# Altium PCB MiniHeating2.pcbdoc
Units mil, origin at the board's own origin, x right, y up, seen from the top; angles counter-clockwise.
Board outline 3060 x 2950 mil, 2 copper layers (Top Layer, Bottom Layer); 62 components, 63 nets, 242 pads, 148 vias.
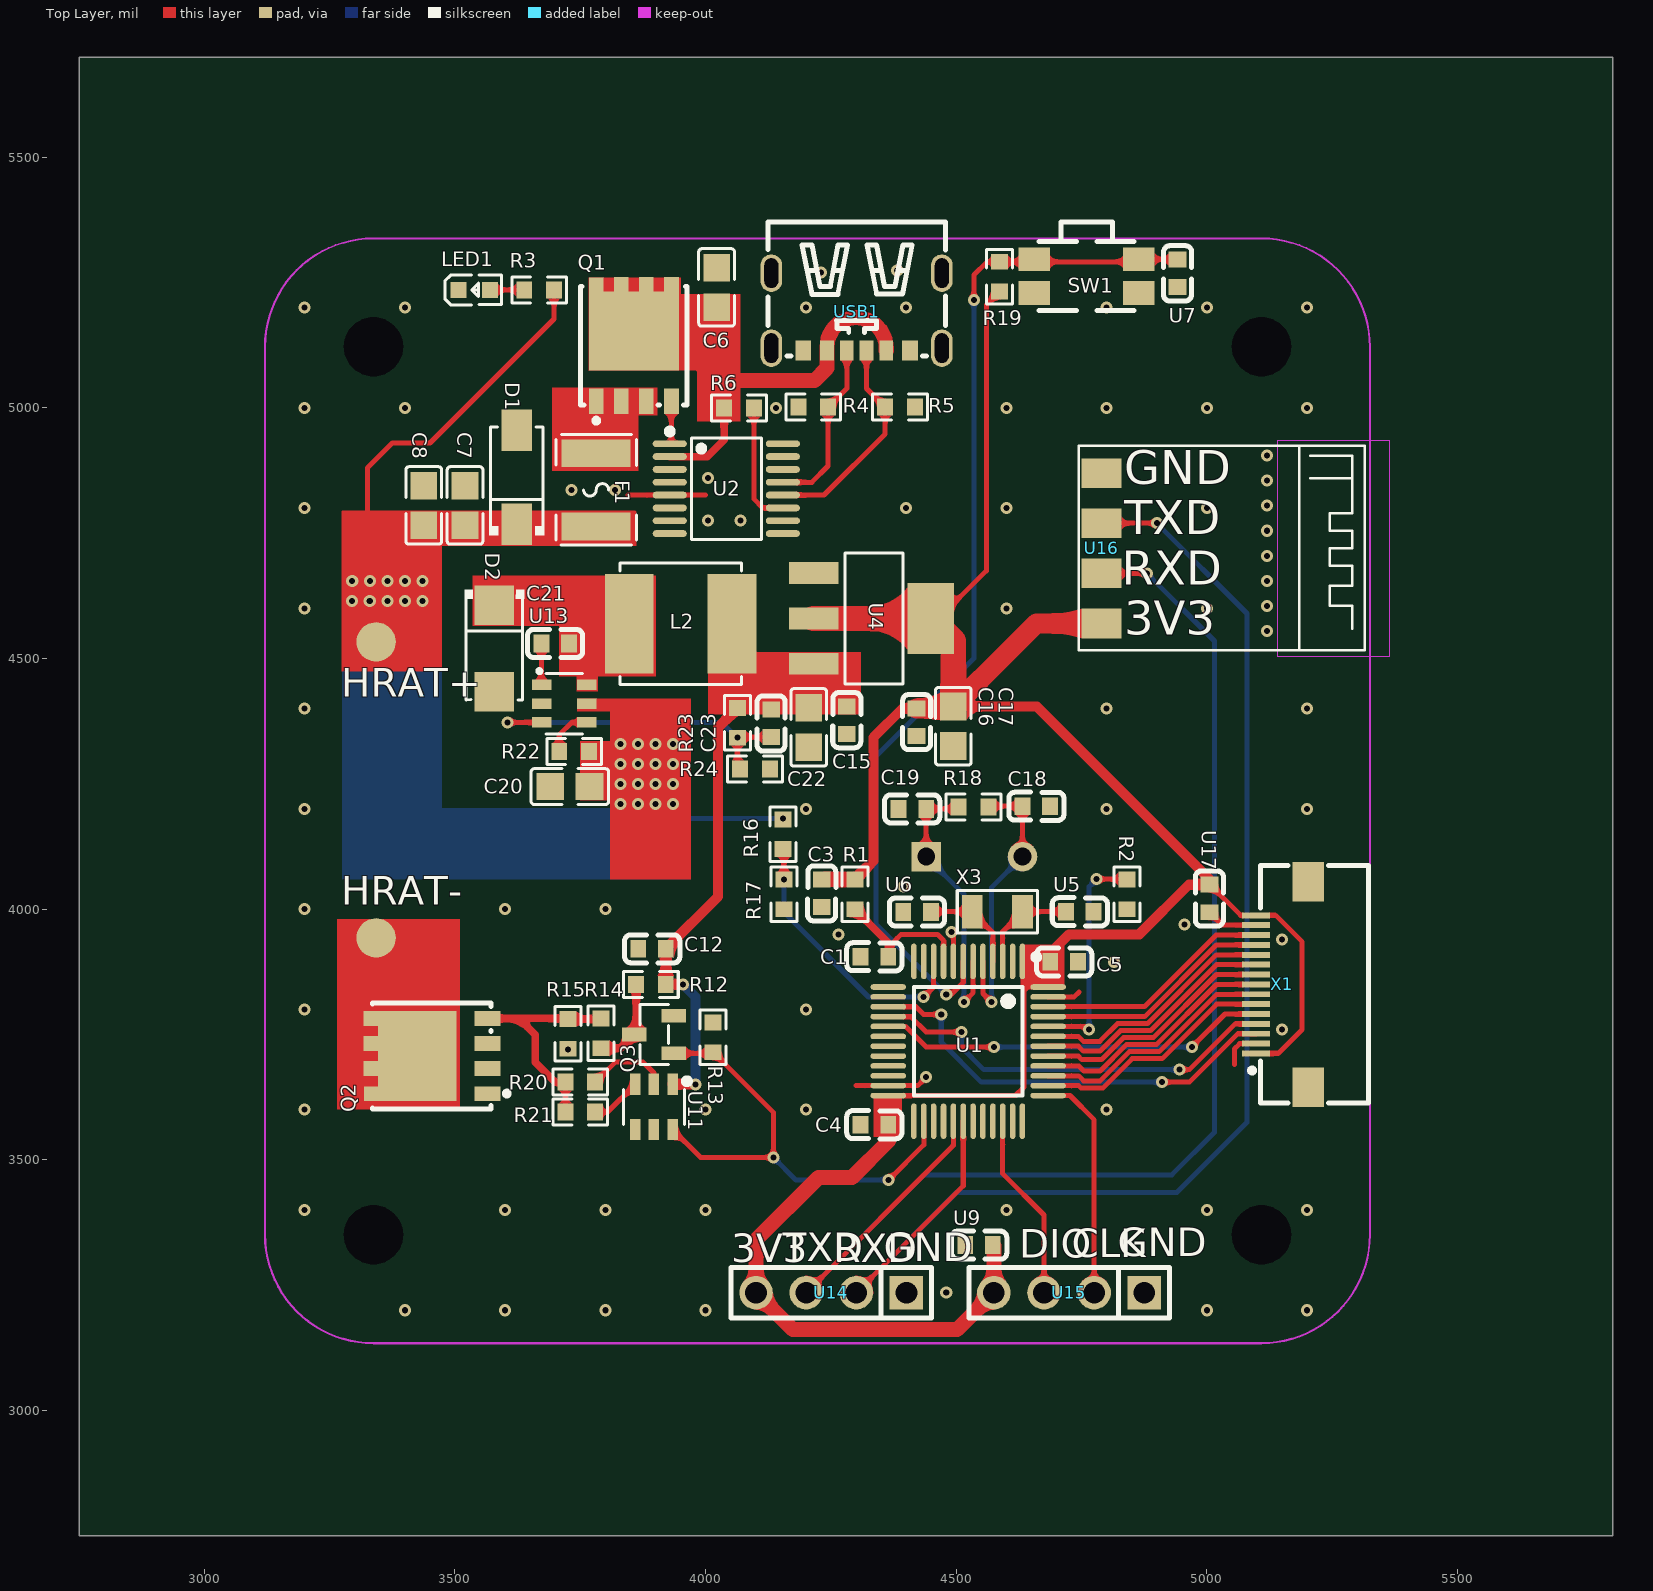
[diagram p0: Top Layer view]
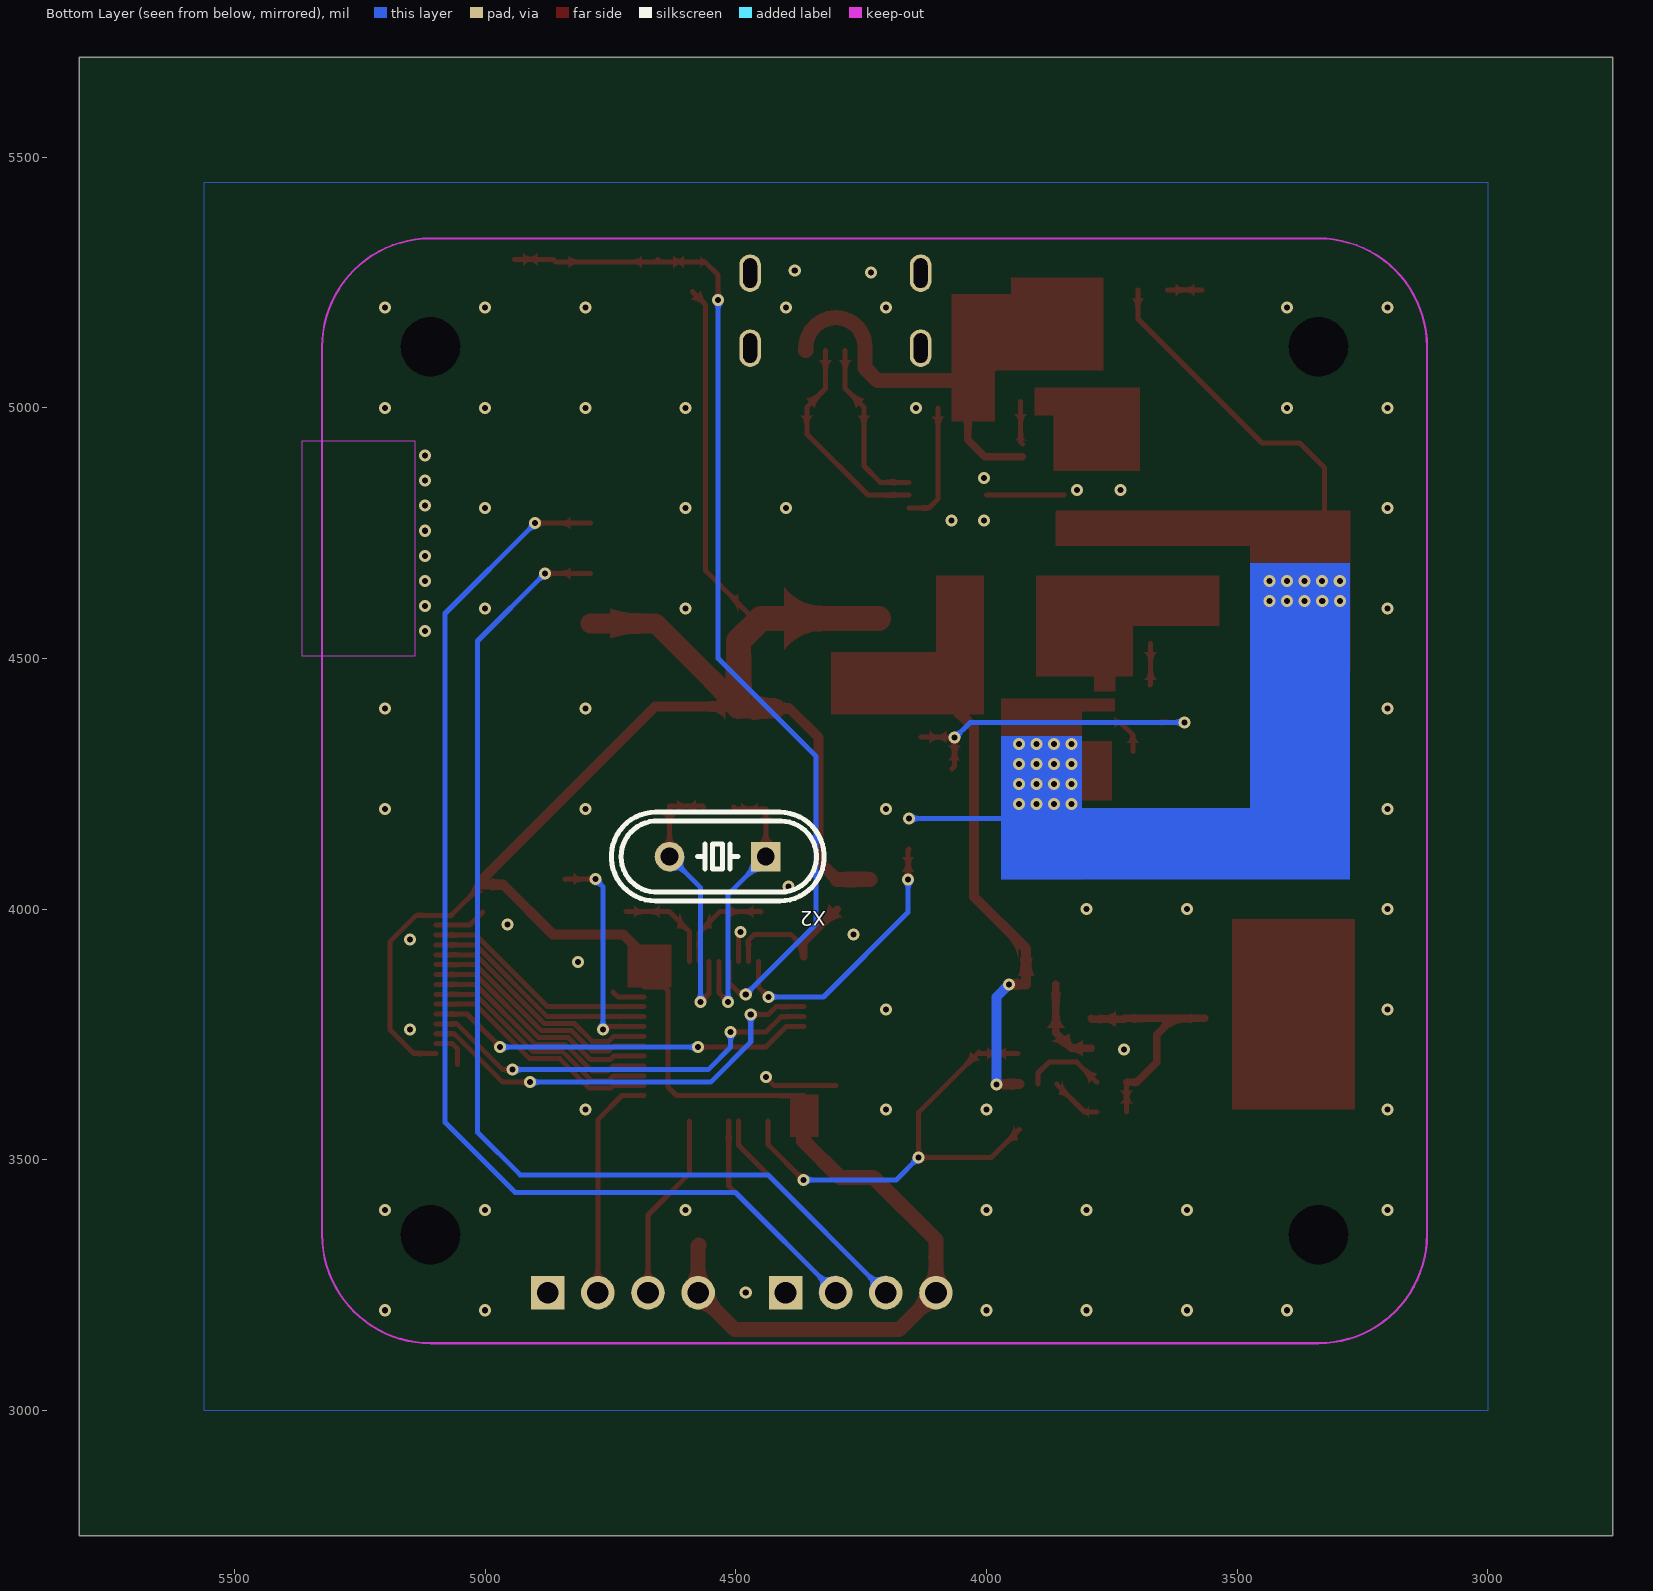
[diagram p1: Bottom Layer view, seen from below]

## Layer stack, top to bottom
Top Layer: signal copper (thickness not stored)
Dielectric: dielectric 12.6, FR-4, Dk 4.8
Bottom Layer: signal copper (thickness not stored)

## Board outline
5810,2750 2750,2750 2750,5700 5810,5700
cut-out: 3337.32,5063.11 cw(c3337.32,5122.16) 3278.26,5122.16 cw(c3337.32,5122.16) 3337.32,5181.22 cw(c3337.32,5122.16) 3396.37,5122.16 cw(c3337.32,5122.16)
cut-out: 5108.97,5063.11 cw(c5108.97,5122.16) 5049.91,5122.16 cw(c5108.97,5122.16) 5108.97,5181.22 cw(c5108.97,5122.16) 5168.02,5122.16 cw(c5108.97,5122.16)
cut-out: 5049.91,3350.51 cw(c5108.97,3350.51) 5108.97,3409.57 cw(c5108.97,3350.51) 5168.02,3350.51 cw(c5108.97,3350.51) 5108.97,3291.46 cw(c5108.97,3350.51)
cut-out: 3278.26,3350.51 cw(c3337.32,3350.51) 3337.32,3409.57 cw(c3337.32,3350.51) 3396.37,3350.51 cw(c3337.32,3350.51) 3337.32,3291.46 cw(c3337.32,3350.51)

## Components (designator, comment, footprint, x,y, rotation, side; value= is the part's Value field where it differs from the comment)
C1 "CC0603KRX7R9BB104" C0603 4336.72,3905 r0 top
C3 "CC0603KRX7R9BB104" C0603 4231.68,4031.89 r90 top
C4 "CC0603KRX7R9BB104" C0603 4336.72,3570 r0 top
C5 "CC0603KRX7R9BB104" C0603 4715,3895 r180 top
C6 "10uF_C15415" C0805 4021.81,5240.3 r270 top
C7 "GRT21BC71E106KE13L" C0805 3520.05,4805.42 r270 top
C8 "GRT21BC71E106KE13L" C0805 3437.53,4805.42 r270 top
C12 "C1608C0G1H090D080AA" C0603 3893.06,3921.03 r180 top
C15 "0603BB104K500NGT" C0603 4281.52,4376.82 r270 top
C16 "0603BB104K500NGT" C0603 4420.89,4373.07 r270 top
C17 "GRT21BC71E106KE13L" C0805 4494.13,4365.01 r270 top
C18 "CGA3E2C0G1H060DT0Y0N" C0603 4659.56,4205.43 r180 top
C19 "CGA3E2C0G1H060DT0Y0N" C0603 4412.32,4200 r0 top
C20 "GRT21BC71E106KE13L" C0805 3729.24,4244.68 r0 top
C21 "0603BB104K500NGT" C0603 3700,4530 r0 top
C22 "GRT21BC71E106KE13L" C0805 4205.55,4362.64 r90 top
C23 "0603BB104K500NGT" C0603 4130.67,4370.83 r90 top
D1 "SZ1SMA26AT3G" SMA_L4.3-W2.6-LS5.2-FD 3623.25,4861.55 r270 top
D2 "SS34_C8678" SMA_L4.3-W2.6-LS5.2-RD 3578.5,4519.99 r270 top
F1 "FSMD075-33R" F1812 3781.62,4836.61 r270 top
L2 "SWPA6045S100MT" IND-SMD_L6.0-W6.0_SWPA6045S 3950.15,4569.49 r0 top
LED1 "KT-0603R" LED0603-RD 3538.34,5235.16 r0 top
Q1 "BSC123N08NS3 G" PG-TDSON-8_L5.0-W6.0-P1.27-BL-EP 3856.62,5124.29 r0 top
Q2 "BSC123N08NS3 G" PG-TDSON-8_L5.0-W6.0-P1.27-BL-EP 3453.73,3707.04 r90 top
Q3 "SS8050_C2150" SOT-23-3_L2.9-W1.3-P1.90-LS2.4-BR 3897.28,3750 r0 top
R1 "0603WAF4703T5E" R0603 4297.72,4029.66 r270 top
R2 "0603WAF2402T5E" R0603 4840.34,4029.66 r270 top
R3 "RNCS0603BKE10K0" R0603 3667.87,5235.29 r180 top
R4 "AC0603DR-0710KL" R0603 4214.59,5001.61 r180 top
R5 "AC0603DR-0710KL" R0603 4387.83,5001.61 r0 top
R6 "HoLTT0805-1/8W-100K-5%" R0603 4066.62,4999.7 r180 top
R12 "0603WAF4703T5E" R0603 3890.84,3850 r0 top
R13 "0603WAF4703T5E" R0603 4015,3744.36 r270 top
R14 "0603WAF4703T5E" R0603 3791.17,3752.38 r270 top
R15 "0603WAF4703T5E" R0603 3725.16,3751.27 r270 top
R16 "0603WAF4703T5E" R0603 4154.03,4149.66 r90 top
R17 "0603WAF4703T5E" R0603 4156.13,4029.66 r90 top
R18 "0603WAF1004T5E" R0603 4534.23,4203.76 r0 top
R19 "0603WAF1004T5E" R0603 4586.49,5261.89 r270 top
R20 "0603WAF4703T5E" R0603 3750,3655 r0 top
R21 "0603WAF4703T5E" R0603 3750,3595.55 r0 top
R22 "AR03BTC5002A" R0603 3737.61,4314.68 r0 top
R23 "AR03BTC5002A" R0603 4063.39,4371.77 r90 top
R24 "AR03BTC5002A" R0603 4098.37,4280 r180 top
SW1 "TS-1186D-C-A" SW-SMD_TS-1186D-C-A 4760,5262.92 r180 top
U1 "CW32F030C8T6_C3019113" LQFP-48_L7.0-W7.0-P0.50-LS9.0-TL 4523.73,3736.57 r270 top
U2 "IP2721" TSSOP-16_L5.0-W4.4-P0.65-LS6.4-BL 4041.21,4838.94 r270 top
U4 "LM1117GS-3.3" SOT-223-3_L6.5-W3.4-P2.30-LS7.0-BR 4332.31,4580 r180 top
U5 "C1608C0G1H090D080AA" C0603 4746.18,3995 r180 top
U6 "C1608C0G1H090D080AA" C0603 4421.76,3994.24 r0 top
U7 "C1608C0G1H090D080AA" C0603 4941.52,5268.83 r90 top
U9 "C1608C0G1H090D080AA" C0603 4545.38,3330 r180 top
U11 "UCC27511DBVR" SOT-23-6_L2.9-W1.6-P0.95-LS2.8-BL 3896.9,3605.67 r180 top
U13 "LGS5145" SOT-23-6_L2.9-W1.7-P0.95-LS2.8-BL 3718.19,4410 r270 top
U14 "ZX-PZ2.54-1-4PZZ" HDR-TH_4P-P2.54-V-M 4250.55,3235 r180 top
U15 "ZX-PZ2.54-1-4PZZ" HDR-TH_4P-P2.54-V-M 4725,3235 r180 top
U16 "ECB01H2" ECB01H2 5315,4925 r270 top
U17 "C1608C0G1H090D080AA" C0603 5005,4021.62 r90 top
USB1 "TYPE-C-6P-DIP2X2" TYPE-C-SMD_TYPE-C-6P 4301.21,5191.61 r180 top
X1 "AFC01-S15FCA-00" FPC-SMD_15P-P0.50_JS_AFC01-S15FCA-00 5150,3850 r90 top
X2 "TAXD8M2GLFBET2T" HC-49US_L11.5-W4.5-P4.88 4535.94,4105 r0 bottom
X3 "SF32WK32768D31T002" OSC-SMD_L3.2-W1.5 4581.8,3995 r180 top

## Footprints (in the part's own frame and the unit in brackets; to place one, negate y for a bottom-side part, rotate by r counter-clockwise, add the part's x,y. Pads: shape width x height; smd on the part's side, far side on the other; paste and mask are expansions set on the pad)
C0603 [mm]
  rect 0.8x0.9 smd mask+0.051: 1(-0.7,0) 2(0.7,0)
  silkscreen extent -1.41,-0.71 1.39,0.72
C0805 [mm]
  rect 1.41x1.35 smd paste-100 mask+0.051: 1(-1,0) 2(1,0)
  silkscreen extent -1.96,-0.9 1.96,0.9
ECB01H2 [mm]
  rect 1.5x2.02 smd mask+0.051: 1(1.397,-13.335) 2(3.937,-13.335) 3(6.477,-13.335) 4(9.017,-13.335)
  silkscreen extent 0,-14.5 10.38,0
F1812 [mil]
  rect 55.38x137.76 smd paste-3937.01 mask+2: 1(-72.97,0) 2(72.97,0)
  silkscreen extent -110,-80 110,80
FPC-SMD_15P-P0.50_JS_AFC01-S15FCA-00 [mm]
  rect 0.3x1.4 smd paste+0 mask+0.05: 1(-3.5,1.325) 2(-3,1.325) 3(-2.5,1.325) 4(-2,1.325) 5(-1.5,1.325) 6(-1,1.325) 7(-0.5,1.325) 8(0,1.325) 9(0.5,1.325) 10(1,1.325) 11(1.5,1.325) 12(2,1.325) 13(2.5,1.325) 14(3,1.325) 15(3.5,1.325)
  rect 2x1.6 smd mask+0.051: 16(5.2,-1.325) 17(-5.2,-1.325)
  silkscreen extent -6.01,-4.37 6.01,1.65
HC-49US_L11.5-W4.5-P4.88 [mm]
  rect 1.5x1.5 hole 0.9 mask+0.051: 1(-2.44,0)
  round 1.5 hole 0.9 mask+0.051: 2(2.44,0)
  silkscreen extent -5.39,-2.25 5.39,2.25
HDR-TH_4P-P2.54-V-M [mm]
  rect 1.7x1.7 hole 1.1 mask+0.051: 1(-3.81,0)
  round 1.7 hole 1.1 mask+0.051: 2(-1.27,0) 3(1.27,0) 4(3.81,0)
  silkscreen extent -5.08,-1.27 5.08,1.27
IND-SMD_L6.0-W6.0_SWPA6045S [mm]
  rect 2.474x5.02 smd mask+0.051: 1(-2.603,0) 2(2.603,0)
  silkscreen extent -3.08,-3.08 3.08,3.08
LED0603-RD [mm]
  rect 0.8x0.8 smd mask+0.051: 1(-0.799,-0.003) 2(0.799,0.003)
  silkscreen extent -1.49,-0.75 1.39,0.76
LQFP-48_L7.0-W7.0-P0.50-LS9.0-TL [mm]
  oval 1.8x0.28 smd mask+0.051: 1(-4.05,2.75) 2(-4.05,2.25) 3(-4.05,1.75) 4(-4.05,1.25) 5(-4.05,0.75) 6(-4.05,0.25) 7(-4.05,-0.25) 8(-4.05,-0.75) 9(-4.05,-1.25) 10(-4.05,-1.75) 11(-4.05,-2.25) 12(-4.05,-2.75) 25(4.05,-2.75) 26(4.05,-2.25) 27(4.05,-1.75) 28(4.05,-1.25) 29(4.05,-0.75) 30(4.05,-0.25) 31(4.05,0.25) 32(4.05,0.75) 33(4.05,1.25) 34(4.05,1.75) 35(4.05,2.25) 36(4.05,2.75)
  oval 0.28x1.8 smd mask+0.051: 13(-2.75,-4.05) 14(-2.25,-4.05) 15(-1.75,-4.05) 16(-1.25,-4.05) 17(-0.75,-4.05) 18(-0.25,-4.05) 19(0.25,-4.05) 20(0.75,-4.05) 21(1.25,-4.05) 22(1.75,-4.05) 23(2.25,-4.05) 24(2.75,-4.05) 37(2.75,4.05) 38(2.25,4.05) 39(1.75,4.05) 40(1.25,4.05) 41(0.75,4.05) 42(0.25,4.05) 43(-0.25,4.05) 44(-0.75,4.05) 45(-1.25,4.05) 46(-1.75,4.05) 47(-2.25,4.05) 48(-2.75,4.05)
  silkscreen extent -4.42,-2.75 2.75,3.6
OSC-SMD_L3.2-W1.5 [mm]
  rect 1.05x1.7 smd mask+0.051: 1(-1.275,0) 2(1.275,0)
  silkscreen extent -2.03,-1.08 2.03,1.08
PG-TDSON-8_L5.0-W6.0-P1.27-BL-EP [mil]
  rect 29.5x51.2 smd paste-3937.01 mask+2: 1(-75,-111) 2(-25,-111) 3(25,-111) 4(75,-111) 5(75,111) 6(25,111) 7(-25,111) 8(-75,110)
  rect 179.53x157.48 smd paste-3937.01 mask+2: 8(0,29)
  silkscreen extent -106,-154 106,118
R0603 [mil]
  rect 31.75x34.02 smd paste-3937.01 mask+2: 1(-29.66,0) 2(29.66,0)
  silkscreen extent -55,-26 55,26
SMA_L4.3-W2.6-LS5.2-FD [mil]
  rect 82.97x61.65 smd paste+0 mask+2: 1(-93.95,0) 2(93.95,0)
  silkscreen extent -100,-55 115,55
SMA_L4.3-W2.6-LS5.2-RD [mm]
  rect 2x2 smd mask+0.051: 1(-2.2,0) 2(2.2,0)
  silkscreen extent -2.98,-1.5 2.6,1.5
SOT-23-3_L2.9-W1.3-P1.90-LS2.4-BR [mm]
  rect 1.25x0.7 smd mask+0.051: 1(1,-0.95) 2(1,0.95) 3(-1,0)
  silkscreen extent -0.73,-1.53 0.73,1.53
SOT-23-6_L2.9-W1.6-P0.95-LS2.8-BL [mil]
  rect 20.95x42.2 smd mask+2: 1(-37.4,-45.24) 2(0,-45.24) 3(37.4,-45.24) 4(37.4,45.24) 5(0,45.24) 6(-37.4,45.24)
  silkscreen extent -72,-57 61,35
SOT-23-6_L2.9-W1.7-P0.95-LS2.8-BL [mm]
  rect 0.532x0.99 smd mask+0.051: 1(-0.95,-1.145) 2(0,-1.145) 3(0.95,-1.145) 4(0.95,1.145) 5(0,1.145) 6(-0.95,1.145)
  silkscreen extent -1.75,-1.37 1.53,0.93
SOT-223-3_L6.5-W3.4-P2.30-LS7.0-BR [mm]
  rect 2.5x1.1 smd mask+0.051: 1(2.97,-2.3) 2(2.97,0) 3(2.97,2.3)
  rect 2.34x3.6 smd mask+0.051: 4(-2.97,0)
  silkscreen extent -1.57,-3.33 1.37,3.33
SW-SMD_TS-1186D-C-A [mm]
  rect 1.6x1.2 smd mask+0.051: 1(-2.65,0.85) 2(2.65,0.85) 3(-2.65,-0.85) 4(2.65,-0.85)
  silkscreen extent -2.4,-2.75 2.4,1.75
TSSOP-16_L5.0-W4.4-P0.65-LS6.4-BL [mil]
  oval 13.5x68.17 smd mask+2: 1(-89.57,-112.82) 2(-63.98,-112.82) 3(-38.39,-112.82) 4(-12.79,-112.82) 5(12.8,-112.82) 6(38.39,-112.82) 7(63.98,-112.82) 8(89.57,-112.82) 9(89.57,112.83) 10(63.98,112.83) 11(38.39,112.83) 12(12.8,112.83) 13(-12.79,112.83) 14(-38.39,112.83) 15(-63.98,112.83) 16(-89.57,112.83)
  silkscreen extent -120,-119 101,70
TYPE-C-SMD_TYPE-C-6P [mm]
  oval 1.1x1.9 hole 0.7 slot 1.5 at 90 deg mask+0.051: 7(-4.32,-1.963) 7(-4.32,1.838) 7(4.32,-1.963) 7(4.32,1.838)
  rect 0.7x1 smd paste-100 mask+0.051: A5(-0.5,1.963) A9(1.5,1.963) B5(0.5,1.963) B9(-1.5,1.963)
  rect 0.8x1 smd paste-100 mask+0.051: A12(2.7,1.963) B12(-2.7,1.963)
  silkscreen extent -4.5,-4.56 4.5,2.24

## Free pads (board coordinates)
  round 78.74 smd mask+2: 1(3342.61,3942.69) 2(3342.61,4533.24)

## Via types
v1: diameter 24, hole 12, Top Layer to Bottom Layer, 82 vias
v2: diameter 24.02, hole 12.01, Top Layer to Bottom Layer, 66 vias

## Nets (pads, with @x,y where several pads share a name; then routed paths per layer and width w, separated by ;. In a path a pad name is that pad's centre, name@x,y a point inside that pad or via, vN(x,y) a via of type N, cw(c..) or ccw(c..) an arc to the next point about the centre after c; other vN are vias at no path point)
$1N7305: C1.2 R1.2 U1.9 | length 290.4
  Top Layer w10: 4364.28,3924.28 4390,3950 4462.44,3950 4474.52,3937.91 U1.9
  Top Layer w15: R1.2 4364.28,3933.44 4364.28,3924.28 C1.2
$1N7307: R2.1 U1.44 | length 451.2
  Top Layer w10: U1.44 4758.9,3766.1 v2(4765,3760) ; v2(4780,4060) 4839.66,4060 R2.1
  Bottom Layer w10: v2(4765,3760) 4765,4045 v2(4780,4060)
$1N7318: Q1.4 U2.1 | length 86.1
  Top Layer w10: U2.1 3931.62,4931.75 Q1.4
$1N7321: F1.1 Q1.1 Q1.2 Q1.3
$1N7325: LED1.2 R3.2 | length 68.4
  Top Layer w10: LED1.2 R3.2
$1N7329: R6.1 U2.11 | length 246.3
  Top Layer w10: R6.1 4096.28,4818.72 4114.45,4800.55 U2.11
$1N7350: Q3.3 R12.1 R14.2 | length 179.4
  Top Layer w15: R14.2 3830.63,3722.72 Q3.3 3861.18,3753.26 R12.1
$1N7464: R20.2 U11.2 | length 165.1
  Top Layer w10: R20.2 3819.66,3695 3875,3695 3896.9,3673.1 U11.2
$1N7465: R21.2 U11.3 | length 102.8
  Top Layer w10: R21.2 3804.14,3595.55 U11.3
$1N11495: C21.1 U13.1 | length 82.9
  Top Layer w10: C21.1 3672.44,4448.07 U13.1
$1N11697: R22.1 U13.4 | length 98.8
  Top Layer w10: R22.1 3707.95,4347.95 3732.6,4372.6 U13.4
$1N11703: C21.2 D2.1 L2.1 U13.6
$1N12087: C23.1 R23.1 R24.2 U13.3 | length 673.7
  Top Layer w10: v2(3605,4372.6) U13.3 ; R24.2 4063.39,4285.31 v2(4063.39,4342.11) 4064.55,4343.27 C23.1
  Bottom Layer w10: v2(3605,4372.6) 4032.4,4372.6 v2@4065,4340
+3.3V: C3.2 C4.2 C5.2 C16.1 C17.1 R1.1 R19.2 U1.1 U1.24 U1.48 U4.2 U4.4 U9.1 U14.4 U15.4 U16.4 U17.2 X1.1 X1.15 | length 5256.8
  Top Layer w10: U1.24 4618.3,3628.3 4635,3645 4635,3837.09 4642.75,3844.84 U1.48 ; U4.4@4457.16,4572.07 4560,4674.9 4560,5205.75 R19.2 ; U17.2 5005.82,4049.18 5067.21,3987.79 X1.15 5137.21,3987.79 5190,3935 5190,3760 5142.2,3712.2 X1.1
  Top Layer w20: R1.1 4335,4096.6 4335,4343.03 4392.6,4400.63 C16.1 ; C17.1 4660.62,4404.38 U17.2@5005,4060 ; C5.2 4687.44,3912.44 4725,3950 4865,3950 4964.18,4049.18 U17.2
  Top Layer w30: C3.2 4297.6,4059.45 R1.1 ; C4.2 4364.28,3537.28 4292,3465 4225,3465 4100.11,3340.11 4100.55,3339.67 U14.4 4174.27,3161.29 4501.29,3161.29 U15.4 4575,3327.94 U9.1
  Top Layer w40: C16.1 4490.38,4400.63 C17.1 4659.75,4570 U16.4
  Top Layer w50: U4.2 U4.4 4457.16,4572.07 4494.13,4535.11 C17.1
+5V: C12.1 C15.1 C22.2 C23.2 L2.2 R12.2 R23.2 U4.3 U11.1 | length 901.6
  Top Layer w20: R12.2 R12.2@3920.62,3850.13 ; U11.1 3979.09,3650.91 v2(3980,3650) ; v2(3955,3850.13) R12.2@3920.62,3850.13 ; R23.2 4025,4363.04 4025,4025.41 C12.1 R12.2@3920.62,3850.13
  Bottom Layer w20: v2(3955,3850.13) 3980,3825.13 v2(3980,3650)
+20V: C7.2 C8.2 C20.2 D1.2 F1.2 pad.2 R3.1 R16.2 R22.2 U13.5 | length 893
  Top Layer w10: 3325,4755 3325,4880 3375,4930 3450,4930 3697.53,5177.53 R3.1
  Bottom Layer w10: 3940,4180 3940.96,4180.96 v2(4154.03,4180.96)
  other v2: 3830,4210 3830,4210 3865,4210 3865,4210 3900,4210 3900,4210 3935,4210 3830,4250 3865,4250 3865,4250 3900,4250 3900,4250 3935,4250 3935,4250 3830,4290 3830,4290 3865,4290 3865,4290 3900,4290 3900,4290 3935,4290 3935,4290 3830,4330 3865,4330 3865,4330 3900,4330 3900,4330 3935,4330 3935,4330 3294.96,4614.84 3329.96,4614.84 3329.96,4614.84 3329.96,4614.84 3364.96,4614.84 3364.96,4614.84 3399.96,4614.84 3399.96,4614.84 3434.96,4614.84 3295,4655 3330.01,4655 3364.99,4655 3399.97,4655 3434.96,4655
CC1: R4.1 U2.13 USB1.A5 | length 349.2
  Top Layer w10: U2.13 4211.73,4851.73 4244.25,4884.25 R4.1 4281.52,5038.89 4281.52,5114.35
CC2: R5.1 U2.12 USB1.B5 | length 436.3
  Top Layer w10: U2.12 4236.14,4826.14 4358.17,4948.17 R5.1 4320.89,5038.89 4320.89,5114.35
EC11_A: U1.45 X1.12 | length 473.9
  Top Layer w10: U1.45 4875.78,3785.78 5018.73,3928.73 X1.12
EC11_B: U1.46 X1.13 | length 473.9
  Top Layer w10: U1.46 4875.47,3805.47 5018.42,3948.42 X1.13
EC11_KEY: U1.43 X1.11 | length 490.3
  Top Layer w10: U1.43 4743.59,3746.41 4753.59,3736.41 4786.41,3736.41 4821.78,3771.78 4881.58,3771.78 5018.85,3909.05 X1.11
GND: C1.1 C3.1 C4.1 C5.1 C6.1 C7.1 C8.1 C12.2 C15.2 C16.2 C17.2 C18.1 C19.1 C20.1 C22.1 D1.1 D2.2 LED1.1 Q2.1 Q2.2 Q2.3 Q3.2 R2.2 R4.2 R5.2 R13.1 R15.2 R17.1 R24.1 SW1.1 SW1.2 U1.8 U1.23 U1.47 U2.5 U4.1 U5.1 U6.1 U7.1 U9.2 U11.4 U11.5 U13.2 U14.1 U15.1 U16.1 U17.1 USB1.7 USB1.A12 USB1.B12 X1.2 X1.14 | length 610.9
  Top Layer w10: 3845,4826.14 U2.5 4000,4826.14 ; 4300,3647.99 U1.23 4422.99,3647.99 v1(4440,3665) ; v1(4490,3955) 4494.2,3950.8 U1.8 ; U1.47 4735.15,3825.15 4745,3835 ; U17.1 5030.96,3968.1 X1.14 ; 5055,3690 5055,3721.61 5065.28,3731.88 X1.2
  other v1: 3400,3200 3600,3200 3800,3200 4000,3200 5000,3200 5200,3200 4480,3235 3200,3400 3600,3400 3800,3400 4000,3400 4600,3400 5000,3400 5200,3400 3200,3600 4000,3600 4200,3600 4800,3600 3725.16,3719.97 5150,3760 3200,3800 4200,3800 4815,3895 5150,3940 4265,3950 4955.62,3969.86 3200,4000 3600,4000 3800,4000 4395,4045 3200,4200 4200,4200 4800,4200 5200,4200 3200,4400 4800,4400 5200,4400 5120,4555 5120,4555 3200,4600 4600,4600 5000,4600 5120,4605 5120,4605 5120,4655 5120,4655 5120,4705 5120,4705 5120,4755 4005,4775 4070,4775 3200,4800 4400,4800 4600,4800 5000,4800 5120,4805 5120,4805 3732.13,4836.61 3819.12,4836.61 3819.12,4836.61 5120,4855 5120,4855 4005,4860 5120,4905 3200,5000 3400,5000 4140,5000 4600,5000 4800,5000 5000,5000 5200,5000 3200,5200 3400,5200 4200,5200 4400,5200 4800,5200 5000,5200 5200,5200 4230,5270 4382.24,5273.89
HEAT_PWM: Q3.1 R13.2 U1.26 U11.6 | length 957.1
  Top Layer w10: U11.6 3989.73,3505 v2(4135,3505) 4135,3594.7 R13.2 4012.9,3712.6 Q3.1 ; v2(4365,3460) 4435.15,3530.15 U1.26
  Bottom Layer w10: v2(4135,3505) 4180,3460 v2(4365,3460)
HRAT-: pad.1 Q2.5 Q2.6 Q2.7 Q2.8
K_CS: U1.17 X1.5 | length 777.9
  Top Layer w10: U1.17 4398.9,3766.1 4440,3725 v2(4575,3725) ; v2(4970,3725) 5035.94,3790.94 X1.5
  Bottom Layer w10: v2(4575,3725) v2(4970,3725)
K_MISO: U1.16 X1.4 | length 832.7
  Top Layer w10: U1.16 4409.22,3785.78 4440,3755 v2(4510,3755) ; v2(4945,3680) 4965,3680 5056.25,3771.25 X1.4
  Bottom Layer w10: v2(4510,3755) 4510,3725 4555,3680 v2(4945,3680)
K_SCK: U1.15 X1.3 | length 868.1
  Top Layer w10: U1.15 4419.59,3805.47 4435.06,3790 v2(4470,3790) ; v2(4910,3655) 4965,3655 5061.57,3751.57 X1.3
  Bottom Layer w10: v2(4470,3790) 4470,3735 4550,3655 v2(4910,3655)
NMOS-G: Q2.4 R14.1 R15.1 R20.1 R21.1 | length 464
  Top Layer w10: R21.1 R20.1
  Top Layer w15: Q2.4 3627.96,3782.04 ; R20.1 3700,3655 3660,3695 3660,3750 3627.96,3782.04 ; R14.1 3790.06,3780.93 R15.1 3724.05,3782.04 3627.96,3782.04
NRST: R19.1 SW1.3 SW1.4 U1.7 U7.2 | length 2086
  Top Layer w10: v2(4480,3830) 4490,3830 4513.89,3853.89 U1.7 ; v2(4535,5215) 4535,5265 4561.55,5291.55 R19.1 SW1.4@4650.84,5291.55 ; SW1.4 SW1.4@4650.84,5291.55 ; U7.2 SW1.3 4859.5,5291.55 SW1.4@4650.84,5291.55
  Bottom Layer w10: v2(4480,3830) 4340,3970 4340,4305 4535,4500 v2(4535,5215)
OLED_CLK: U1.38 X1.6 | length 485.6
  Top Layer w10: U1.38 4744.13,3647.99 4748.47,3643.66 4792.87,3643.66 4850.94,3701.72 4910.6,3701.72 5019.51,3810.62 X1.6
OLED_CS: U1.42 X1.10 | length 490.3
  Top Layer w10: U1.42 4743.47,3726.73 4753.47,3716.73 4786.73,3716.73 4827.77,3757.77 4887.39,3757.77 5018.98,3889.36 X1.10
OLED_D/C: U1.41 X1.9 | length 487.9
  Top Layer w10: U1.41 4743.36,3707.04 4750.4,3700 4789.8,3700 4833.55,3743.75 4893.19,3743.75 5019.13,3869.68 X1.9
OLED_RES: U1.40 X1.8 | length 490.3
  Top Layer w10: U1.40 4744.38,3687.36 4754.38,3677.36 4786.96,3677.36 4839.33,3729.73 4898.97,3729.73 5019.23,3849.99 X1.8
OLED_SDA: U1.39 X1.7 | length 490.3
  Top Layer w10: U1.39 4744.27,3667.67 4754.27,3657.67 4787.07,3657.67 4845.13,3715.73 4904.8,3715.73 5019.36,3830.3 X1.7
PA0: R16.1 R17.2 U1.10 | length 555.1
  Top Layer w10: R16.1 4156.13,4117.9 v2(4156.13,4059.32) ; v2(4435,3825) 4454.83,3844.83 U1.10
  Bottom Layer w10: v2(4156.13,4059.32) 4156.13,3993.87 4325,3825 v2(4435,3825)
PA1: U1.11
PA2: U1.12
PA3: U1.13
PA4: U1.14
PA8: U1.29 U14.3 U16.3 | length 2671.7
  Top Layer w10: U14.3 4494.2,3528.65 U1.29 ; U16.3 v2(4880,4670)
  Bottom Layer w10: U14.3 4435.55,3470 4930,3470 5015,3555 5015,4535 v2(4880,4670)
PA9: U1.30 U14.2 U16.2 | length 2730.3
  Top Layer w10: U14.2 4513.89,3448.34 U1.30 ; U16.2 v2(4900,4770)
  Bottom Layer w10: U14.2 4500.55,3435 4940,3435 5080,3575 5080,4590 v2(4900,4770)
PA10: U1.31
PA11: U1.32
PA12: U1.33
PA13/SWDDIO: U1.34 U15.3 | length 376.2
  Top Layer w10: U1.34 4592.63,3472.37 4675,3390 U15.3
PA14/SWCLK: U1.37 U15.2 | length 456.8
  Top Layer w10: U1.37 4726.7,3628.3 4775,3580 U15.2
PB0: U1.18
PB1: U1.19
PB2: U1.20
PB10: U1.21
PB11: U1.22
PB12: U1.25
PB14: U1.27
PB15: U1.28
PC13: U1.2
PC14: U1.3 U5.2 X3.1 | length 201.9
  Top Layer w10: U1.3 4592.63,3955.63 X3.1 U5.2
PC15: U1.4 U6.2 X3.2 | length 198.7
  Top Layer w10: U6.2 4450.08,3995 X3.2 4572.94,3953.66 U1.4
PF0: C18.2 R18.2 U1.5 X2.2 | length 572.9
  Top Layer w10: U1.5 4553.26,3831.74 v2(4570,3815) ; R18.2 4565.56,4205.43 C18.2 X2.2
  Bottom Layer w10: v2(4570,3815) 4570,4043 X2.2
PF1: C19.2 R18.1 U1.6 X2.1 | length 571.1
  Top Layer w10: X2.1 C19.2 4500.8,4200 R18.1 ; v2(4515,3815) 4533.57,3833.57 U1.6
  Bottom Layer w10: X2.1 4515,4029.88 v2(4515,3815)
PF6: U1.35
PF7: U1.36
VBUS: C6.2 Q1.5 Q1.6 Q1.7 Q1.8 R6.2 U2.2 USB1.A9 USB1.B9 | length 646.2
  Top Layer w15: U2.2 4002.92,4902.92 4036.96,4936.96 R6.2
  Top Layer w30: 4025,5055 4217.49,5055 4242.15,5079.66 USB1.A9 4242.15,5122.15 cw(c4300,5122.15) 4300,5180 cw(c4300,5119.74) 4360.26,5119.74 USB1.B9
"": U2.3 U2.4 U2.6 U2.7 U2.8 U2.9 U2.10 U2.14 U2.15 U2.16 X1.16 X1.17

## Polygon pours and split planes (outlines as drawn)
GND on Top Layer (solid, remove dead copper, pour order 0): 3000,3000 5560,3000 5560,5450 3000,5450
GND on Bottom Layer (solid, remove dead copper, pour order 1): 3000,3000 5560,3000 5560,5450 3000,5450

## Keep-outs
Board Outline Layer:
  lines w3.94 net "": 3337.32,5338.2 5108.47,5338.2 cw(c5108.47,5121.66) 5325,5121.66 5325,3350.51 ; 3337.32,5338.2 ccw(c3337.32,5121.66) 3120.78,5121.66 3120.78,3350.51 ccw(c3337.32,3350.51) 3337.32,3133.98 5108.47,3133.98 ccw(c5108.47,3350.51) 5325,3350.51 ; 3337.32,5338.2 ccw(c3337.32,5122.16) 3121.28,5122.16 3121.28,3350.51 ccw(c3337.32,3350.51) 3337.32,3134.48 5108.97,3134.48 ccw(c5108.97,3350.51) 5325,3350.51 ; 3337.32,5338.2 5108.97,5338.2 cw(c5108.97,5122.16) 5325,5122.16 5325,3350.51
Multi-Layer:
  region net "": 5140,4505 5365,4505 5365,4935 5140,4935

## Other copper
Top Layer:
  drawing of 177 lines, arcs and shapes, not listed
Bottom Layer:
  region net +20V: 3275,4101.11 3473.41,4101.11 3473.41,4690 3275,4690
  region net +20V: 3275,4060 3910,4060 3910,4201.62 3275,4201.62
  region net +20V: 3810,4060 3970,4060 3970,4345 3810,4345
  region net PF1: 4472.95,4064.87 4480.02,4071.94 cw(c4506.53,4098.45) 4469.41,4093.15 4451.73,4075.47 cw(c4446.43,4038.35)
  region net PF0: 4600.04,4080.11 4607.11,4073.04 4608.37,4074.22 4609.18,4074.89 4609.98,4075.48 4610.75,4075.99 4611.5,4076.42 4612.25,4076.77 4612.98,4077.06 4613.7,4077.29 4614.41,4077.45 4615.13,4077.56 4615.84,4077.63 4616.55,4077.64 4617.26,4077.62 4618.34,4077.52 4619.81,4077.29 4624.62,4076.26 4626.89,4075.85 4628.85,4075.61 4630.97,4075.48 4632.66,4075.48 4633.85,4075.53 4602.53,4106.85 4602.47,4105.08 4602.5,4103.42 4602.67,4101.34 4602.93,4099.42 4603.62,4095.93 4604.36,4092.43 4604.52,4091.34 4604.62,4090.26 4604.65,4089.54 4604.63,4088.83 4604.57,4088.12 4604.46,4087.41 4604.29,4086.7 4604.06,4085.97 4603.78,4085.24 4603.42,4084.5 4602.99,4083.74 4602.48,4082.97 4601.9,4082.18 4601.22,4081.37
  region net PA9: 4336.3,3263.68 4329.23,3270.75 4327.76,3269.37 4326.81,3268.59 4325.9,3267.91 4325,3267.33 4324.13,3266.84 4323.28,3266.44 4322.44,3266.12 4321.61,3265.87 4320.79,3265.7 4319.98,3265.59 4319.18,3265.54 4318.37,3265.55 4317.56,3265.6 4316.33,3265.75 4314.66,3266.08 4309.17,3267.43 4306.56,3267.96 4304.29,3268.27 4302.46,3268.42 4300.52,3268.47 4298.46,3268.4 4333.95,3232.9 4334.02,3234.97 4333.97,3236.91 4333.83,3238.74 4333.51,3241.01 4332.99,3243.62 4331.63,3249.11 4331.31,3250.78 4331.15,3252.01 4331.1,3252.82 4331.09,3253.62 4331.14,3254.43 4331.25,3255.24 4331.42,3256.06 4331.67,3256.89 4331.99,3257.73 4332.39,3258.58 4332.88,3259.45 4333.46,3260.34 4334.14,3261.26 4334.92,3262.21
  region net PA8: 4236.3,3263.68 4229.23,3270.75 4227.76,3269.37 4226.81,3268.59 4225.9,3267.91 4225,3267.33 4224.13,3266.84 4223.28,3266.44 4222.44,3266.12 4221.61,3265.87 4220.79,3265.7 4219.98,3265.59 4219.18,3265.54 4218.37,3265.55 4217.56,3265.6 4216.33,3265.75 4214.66,3266.08 4209.17,3267.43 4206.56,3267.96 4204.29,3268.27 4202.46,3268.42 4200.52,3268.47 4198.46,3268.4 4233.95,3232.9 4234.02,3234.97 4233.97,3236.91 4233.83,3238.74 4233.51,3241.01 4232.99,3243.62 4231.63,3249.11 4231.31,3250.78 4231.15,3252.01 4231.1,3252.82 4231.09,3253.62 4231.14,3254.43 4231.25,3255.24 4231.42,3256.06 4231.67,3256.89 4231.99,3257.73 4232.39,3258.58 4232.88,3259.45 4233.46,3260.34 4234.14,3261.26 4234.92,3262.21
  region net +20V: 4137.68,4185.96 4137.68,4175.96 4138.25,4175.94 4138.82,4175.87 4139.39,4175.76 4139.96,4175.62 4140.52,4175.43 4141.63,4174.98 4142.71,4174.41 4143.74,4173.77 4144.73,4173.07 4146.09,4171.95 4146.09,4189.97 4144.73,4188.85 4143.74,4188.15 4142.71,4187.5 4141.63,4186.94 4140.52,4186.49 4139.96,4186.3 4139.39,4186.16 4138.82,4186.05 4138.25,4185.98
  region net $1N12087: 3621.35,4367.6 3621.35,4377.6 3620.78,4377.62 3620.21,4377.69 3619.64,4377.8 3619.08,4377.94 3618.51,4378.13 3617.41,4378.58 3616.33,4379.14 3615.29,4379.79 3614.3,4380.49 3612.94,4381.61 3612.94,4363.59 3614.3,4364.71 3615.29,4365.41 3616.33,4366.06 3617.41,4366.62 3618.51,4367.07 3619.08,4367.26 3619.64,4367.4 3620.21,4367.51 3620.78,4367.58
  region net $1N12087: 4055.11,4356.96 4048.04,4349.89 4048.4,4349.5 4048.74,4349.07 4049.06,4348.61 4049.37,4348.12 4049.92,4347.06 4050.39,4345.92 4050.78,4344.75 4051.08,4343.58 4051.29,4342.44 4051.41,4341.36 4064.14,4354.1 4061.67,4354.3 4060.46,4354.48 4059.27,4354.73 4058.69,4354.89 4058.13,4355.08 4057.58,4355.3 4057.05,4355.55 4056.53,4355.84 4056.04,4356.17 4055.56,4356.54
  region net PF1: 4520,3831.35 4510,3831.35 4509.98,3830.78 4509.91,3830.21 4509.8,3829.64 4509.66,3829.08 4509.47,3828.51 4509.02,3827.41 4508.46,3826.33 4507.81,3825.29 4507.11,3824.3 4505.99,3822.94 4524.01,3822.94 4522.89,3824.3 4522.19,3825.29 4521.54,3826.33 4520.98,3827.41 4520.53,3828.51 4520.34,3829.08 4520.2,3829.64 4520.09,3830.21 4520.02,3830.78
  region net PF0: 4575,3831.35 4565,3831.35 4564.98,3830.78 4564.91,3830.21 4564.8,3829.64 4564.66,3829.08 4564.47,3828.51 4564.02,3827.41 4563.46,3826.33 4562.81,3825.29 4562.11,3824.3 4560.99,3822.94 4579.01,3822.94 4577.89,3824.3 4577.19,3825.29 4576.54,3826.33 4575.98,3827.41 4575.53,3828.51 4575.34,3829.08 4575.2,3829.64 4575.09,3830.21 4575.02,3830.78
  region net NRST: 4471.98,3845.1 4464.9,3838.02 4465.29,3837.61 4465.65,3837.16 4465.97,3836.68 4466.27,3836.17 4466.54,3835.65 4467,3834.54 4467.36,3833.38 4467.64,3832.19 4467.84,3831 4468.02,3829.25 4480.75,3841.98 4479,3842.16 4477.81,3842.36 4476.62,3842.64 4475.46,3843 4474.35,3843.46 4473.83,3843.73 4473.32,3844.03 4472.84,3844.35 4472.39,3844.71
  region net NRST: 4530,5198.65 4540,5198.65 4540.02,5199.22 4540.09,5199.79 4540.2,5200.36 4540.34,5200.92 4540.53,5201.49 4540.98,5202.59 4541.54,5203.67 4542.19,5204.71 4542.89,5205.7 4544.01,5207.06 4525.99,5207.06 4527.11,5205.7 4527.81,5204.71 4528.46,5203.67 4529.02,5202.59 4529.47,5201.49 4529.66,5200.92 4529.8,5200.36 4529.91,5199.79 4529.98,5199.22
  region net PA0: 4418.65,3830 4418.65,3820 4419.22,3819.98 4419.79,3819.91 4420.36,3819.8 4420.92,3819.66 4421.49,3819.47 4422.59,3819.02 4423.67,3818.46 4424.71,3817.81 4425.7,3817.11 4427.06,3815.99 4427.06,3834.01 4425.7,3832.89 4424.71,3832.19 4423.67,3831.54 4422.59,3830.98 4421.49,3830.53 4420.92,3830.34 4420.36,3830.2 4419.79,3830.09 4419.22,3830.02
  region net PA0: 4151.13,4042.97 4161.13,4042.97 4161.15,4043.54 4161.22,4044.11 4161.33,4044.68 4161.48,4045.24 4161.66,4045.81 4162.11,4046.91 4162.68,4047.99 4163.32,4049.03 4164.02,4050.02 4165.14,4051.38 4147.13,4051.38 4148.24,4050.02 4148.94,4049.03 4149.59,4047.99 4150.15,4046.91 4150.61,4045.81 4150.79,4045.24 4150.93,4044.68 4151.04,4044.11 4151.11,4043.54
  region net $1N7307: 4770,3776.35 4760,3776.35 4759.98,3775.78 4759.91,3775.21 4759.8,3774.64 4759.66,3774.08 4759.47,3773.51 4759.02,3772.41 4758.46,3771.33 4757.81,3770.29 4757.11,3769.3 4755.99,3767.94 4774.01,3767.94 4772.89,3769.3 4772.19,3770.29 4771.54,3771.33 4770.98,3772.41 4770.53,3773.51 4770.34,3774.08 4770.2,3774.64 4770.09,3775.21 4770.02,3775.78
  region net $1N7307: 4764.9,4051.98 4771.98,4044.9 4772.39,4045.29 4772.84,4045.65 4773.32,4045.97 4773.83,4046.27 4774.35,4046.54 4775.46,4047 4776.62,4047.36 4777.81,4047.64 4779,4047.84 4780.75,4048.02 4768.02,4060.75 4767.84,4059 4767.64,4057.81 4767.36,4056.62 4767,4055.46 4766.54,4054.35 4766.27,4053.83 4765.97,4053.32 4765.65,4052.84 4765.29,4052.39
  region net K_SCK: 4465,3773.65 4475,3773.65 4475.02,3774.22 4475.09,3774.79 4475.2,3775.36 4475.34,3775.92 4475.53,3776.49 4475.98,3777.59 4476.54,3778.67 4477.19,3779.71 4477.89,3780.7 4479.01,3782.06 4460.99,3782.06 4462.11,3780.7 4462.81,3779.71 4463.46,3778.67 4464.02,3777.59 4464.47,3776.49 4464.66,3775.92 4464.8,3775.36 4464.91,3774.79 4464.98,3774.22
  region net K_MISO: 4505,3738.65 4515,3738.65 4515.02,3739.22 4515.09,3739.79 4515.2,3740.36 4515.34,3740.92 4515.53,3741.49 4515.98,3742.59 4516.54,3743.67 4517.19,3744.71 4517.89,3745.7 4519.01,3747.06 4500.99,3747.06 4502.11,3745.7 4502.81,3744.71 4503.46,3743.67 4504.02,3742.59 4504.47,3741.49 4504.66,3740.92 4504.8,3740.36 4504.91,3739.79 4504.98,3739.22
  region net K_CS: 4591.35,3720 4591.35,3730 4590.78,3730.02 4590.21,3730.09 4589.64,3730.2 4589.08,3730.34 4588.51,3730.53 4587.41,3730.98 4586.33,3731.54 4585.29,3732.19 4584.3,3732.89 4582.94,3734.01 4582.94,3715.99 4584.3,3717.11 4585.29,3717.81 4586.33,3718.46 4587.41,3719.02 4588.51,3719.47 4589.08,3719.66 4589.64,3719.8 4590.21,3719.91 4590.78,3719.98
  region net K_SCK: 4893.65,3660 4893.65,3650 4894.22,3649.98 4894.79,3649.91 4895.36,3649.8 4895.92,3649.66 4896.49,3649.47 4897.59,3649.02 4898.67,3648.46 4899.71,3647.81 4900.7,3647.11 4902.06,3645.99 4902.06,3664.01 4900.7,3662.89 4899.71,3662.19 4898.67,3661.54 4897.59,3660.98 4896.49,3660.53 4895.92,3660.34 4895.36,3660.2 4894.79,3660.09 4894.22,3660.02
  region net K_MISO: 4928.65,3685 4928.65,3675 4929.22,3674.98 4929.79,3674.91 4930.36,3674.8 4930.92,3674.66 4931.49,3674.47 4932.59,3674.02 4933.67,3673.46 4934.71,3672.81 4935.7,3672.11 4937.06,3670.99 4937.06,3689.01 4935.7,3687.89 4934.71,3687.19 4933.67,3686.54 4932.59,3685.98 4931.49,3685.53 4930.92,3685.34 4930.36,3685.2 4929.79,3685.09 4929.22,3685.02
  region net K_CS: 4953.65,3730 4953.65,3720 4954.22,3719.98 4954.79,3719.91 4955.36,3719.8 4955.92,3719.66 4956.49,3719.47 4957.59,3719.02 4958.67,3718.46 4959.71,3717.81 4960.7,3717.11 4962.06,3715.99 4962.06,3734.01 4960.7,3732.89 4959.71,3732.19 4958.67,3731.54 4957.59,3730.98 4956.49,3730.53 4955.92,3730.34 4955.36,3730.2 4954.79,3730.09 4954.22,3730.02
  region net PA8: 4888.02,4654.9 4895.1,4661.98 4894.71,4662.39 4894.35,4662.84 4894.03,4663.32 4893.73,4663.83 4893.46,4664.35 4893,4665.46 4892.64,4666.62 4892.36,4667.81 4892.16,4669 4891.98,4670.75 4879.25,4658.02 4881,4657.84 4882.19,4657.64 4883.38,4657.36 4884.54,4657 4885.65,4656.54 4886.17,4656.27 4886.68,4655.97 4887.16,4655.65 4887.61,4655.29
  region net PA9: 4908.02,4754.9 4915.1,4761.98 4914.71,4762.39 4914.35,4762.84 4914.03,4763.32 4913.73,4763.83 4913.46,4764.35 4913,4765.46 4912.64,4766.62 4912.36,4767.81 4912.16,4769 4911.98,4770.75 4899.25,4758.02 4901,4757.84 4902.19,4757.64 4903.38,4757.36 4904.54,4757 4905.65,4756.54 4906.17,4756.27 4906.68,4755.97 4907.16,4755.65 4907.61,4755.29
  region net HEAT_PWM: 4348.65,3465 4348.65,3455 4349.22,3454.98 4349.79,3454.91 4350.36,3454.8 4350.92,3454.66 4351.49,3454.47 4352.59,3454.02 4353.67,3453.46 4354.71,3452.81 4355.7,3452.11 4357.06,3450.99 4357.06,3469.01 4355.7,3467.89 4354.71,3467.19 4353.67,3466.54 4352.59,3465.98 4351.49,3465.53 4350.92,3465.34 4350.36,3465.2 4349.79,3465.09 4349.22,3465.02
  region net HEAT_PWM: 4143.02,3489.9 4150.1,3496.98 4149.71,3497.39 4149.35,3497.84 4149.03,3498.32 4148.73,3498.83 4148.46,3499.35 4148,3500.46 4147.64,3501.62 4147.36,3502.81 4147.16,3504 4146.98,3505.75 4134.25,3493.02 4136,3492.84 4137.19,3492.64 4138.38,3492.36 4139.54,3492 4140.65,3491.54 4141.17,3491.27 4141.68,3490.97 4142.16,3490.65 4142.61,3490.29

## Silkscreen, mask and mechanical layers (free items; w line width, h text height)
Top Silkscreen Layer:
  text "HRAT+" at 3273.06,4423.6 h56.64
  text "HRAT-" at 3273.06,4008.45 h56.64
  text "GND" at 4822.03,3307.5 h56.64
  text "CLK" at 4730.06,3305.45 h56.64
  text "DIO" at 4625.6,3304.43 h56.64
  text "TXD" at 4153.78,3297.5 h56.64
  text "GND" at 4355.6,3297.5 h56.64
  text "3V3" at 4050.62,3295.45 h56.64
  text "RXD" at 4255.06,3295.45 h56.64
Mechanical Layer:
  lines w1 net "": 3278.26,3350.51 cw(c3337.32,3350.51) 3337.32,3409.57 cw(c3337.32,3350.51) 3396.37,3350.51 cw(c3337.32,3350.51) 3337.32,3291.46 cw(c3337.32,3350.51) 3278.26,3350.51 ; 3278.26,5122.16 ccw(c3337.32,5122.16) 3337.32,5063.11 ccw(c3337.32,5122.16) 3396.37,5122.16 ccw(c3337.32,5122.16) 3337.32,5181.22 ccw(c3337.32,5122.16) 3278.26,5122.16 ; 5049.91,3350.51 cw(c5108.97,3350.51) 5108.97,3409.57 cw(c5108.97,3350.51) 5168.02,3350.51 cw(c5108.97,3350.51) 5108.97,3291.46 cw(c5108.97,3350.51) 5049.91,3350.51 ; 5049.91,5122.16 ccw(c5108.97,5122.16) 5108.97,5063.11 ccw(c5108.97,5122.16) 5168.02,5122.16 ccw(c5108.97,5122.16) 5108.97,5181.22 ccw(c5108.97,5122.16) 5049.91,5122.16

## Text inside footprints (layer, text, board x,y; h text height)
U16: Top Silkscreen Layer "3V3" at 4835.08,4547.54 h67.97; Top Silkscreen Layer "RXD" at 4830.08,4647.54 h67.97; Top Silkscreen Layer "TXD" at 4835.08,4747.54 h67.97; Top Silkscreen Layer "GND" at 4835.08,4847.54 h67.97